# Altium PCB pag7936.PcbDoc
Units mil, origin at the board's own origin, x right, y up, seen from the top; angles counter-clockwise.
Board outline 1400 x 650 mil, 6 copper layers (Top, 2-GND, 3-SIG, 4-SIG, 5-GND, Bottom), stack 46.142 mil thick; 67 components, 48 nets, 242 pads, 88 vias.
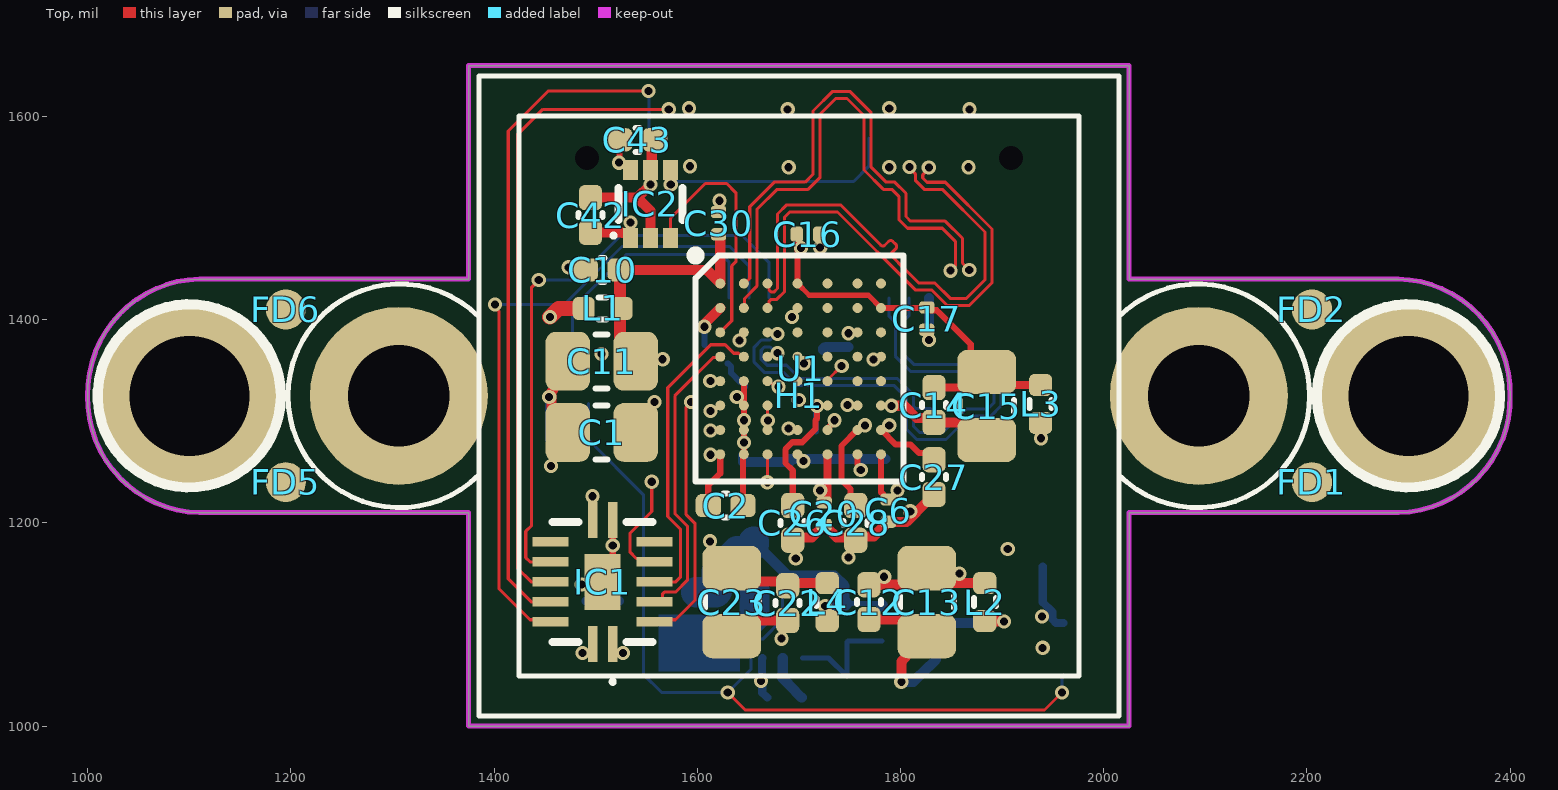
[diagram p0: Top view]
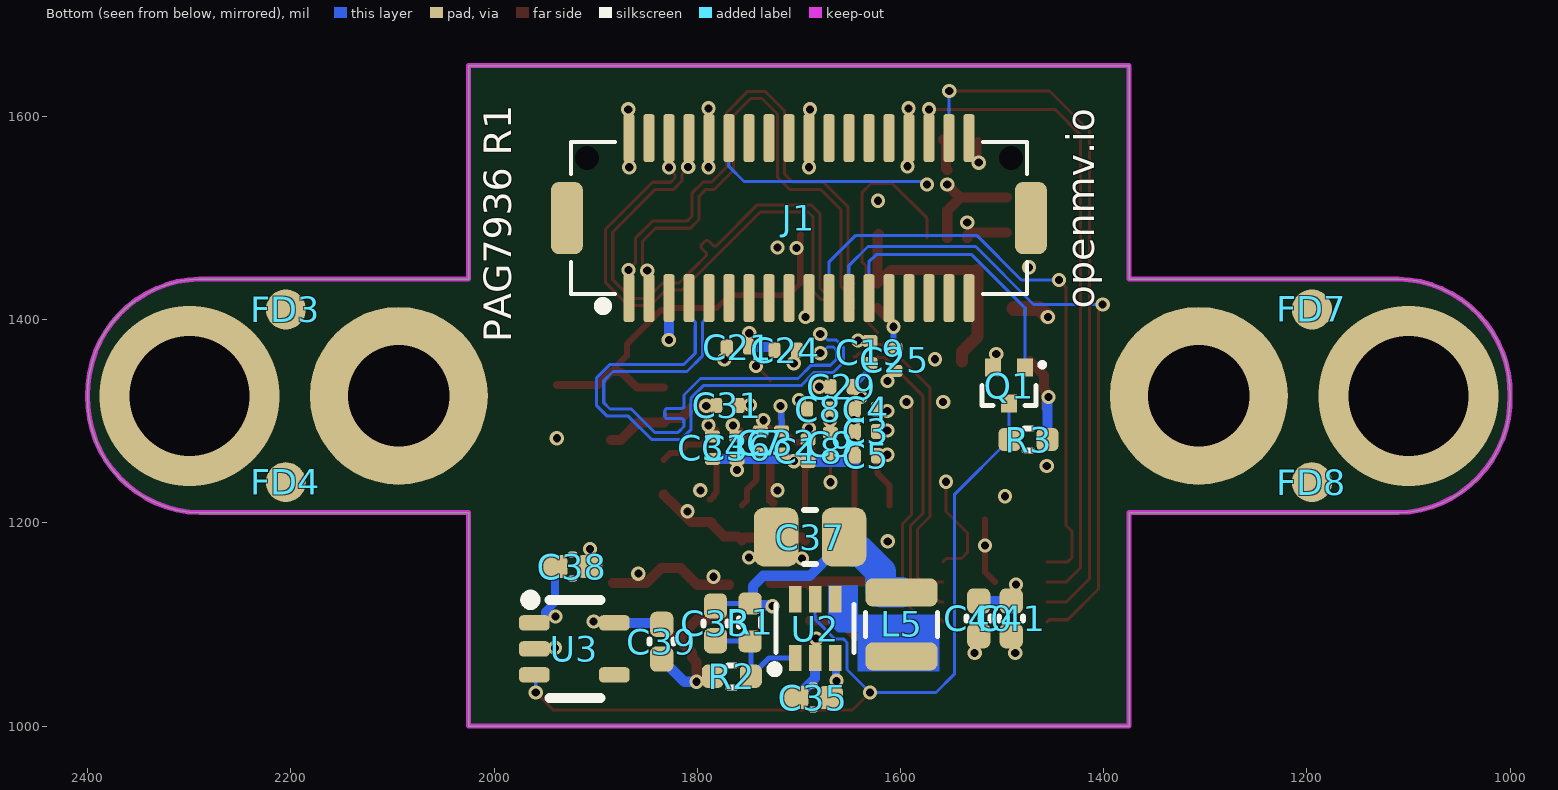
[diagram p1: Bottom view, seen from below]
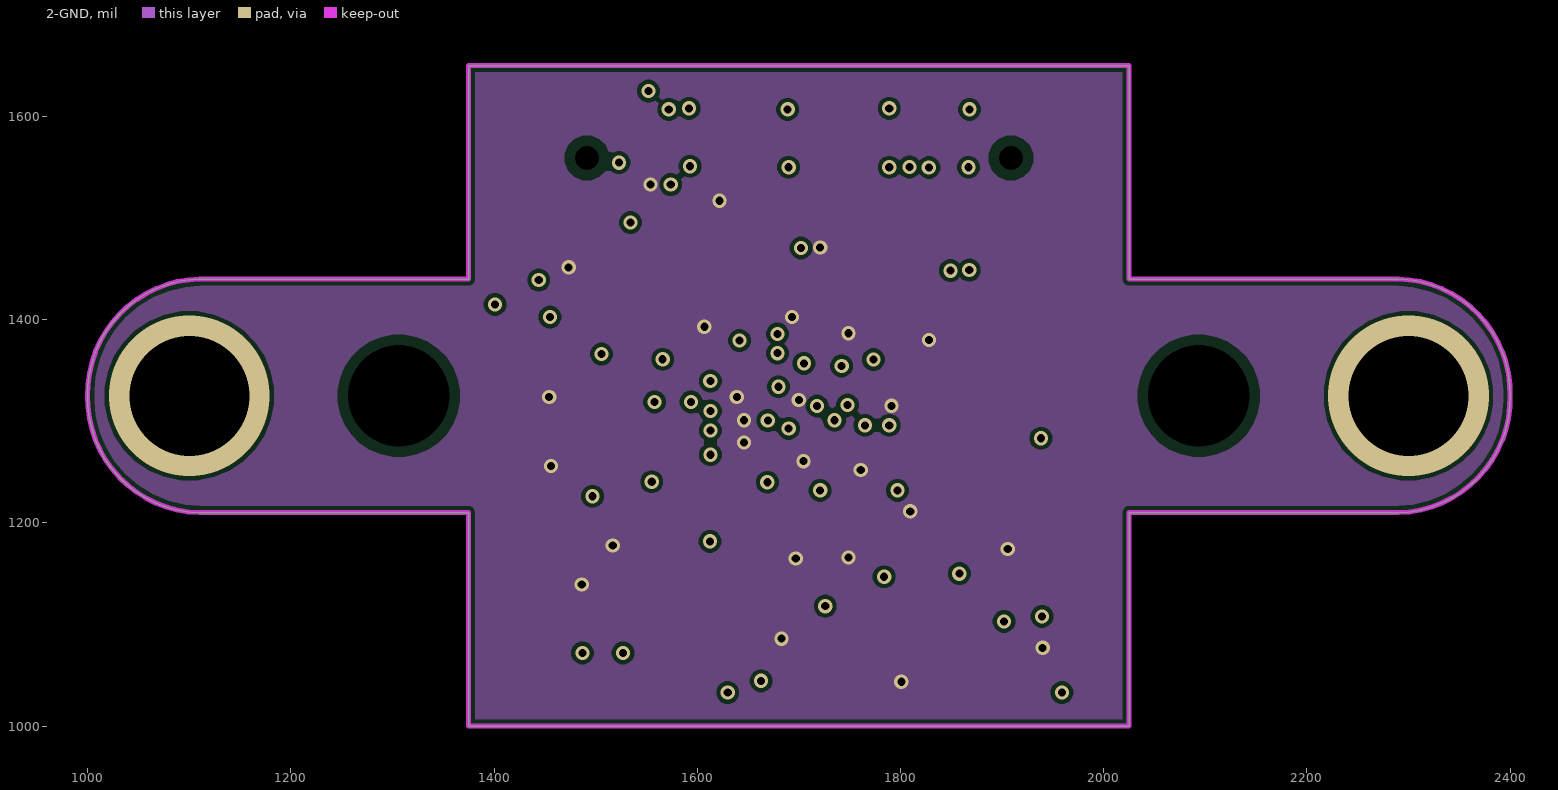
[diagram p2: 2-GND]
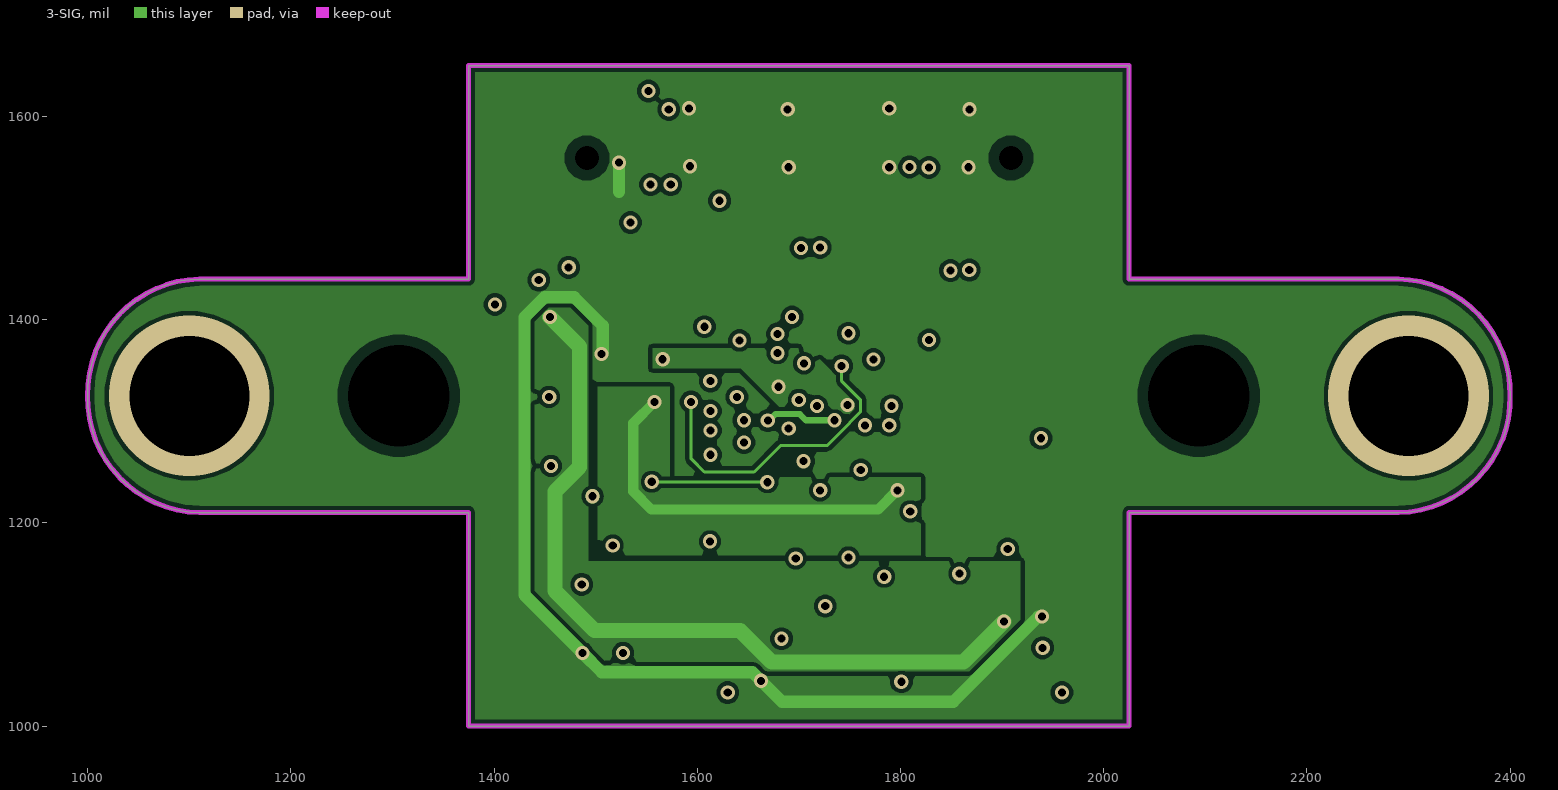
[diagram p3: 3-SIG]
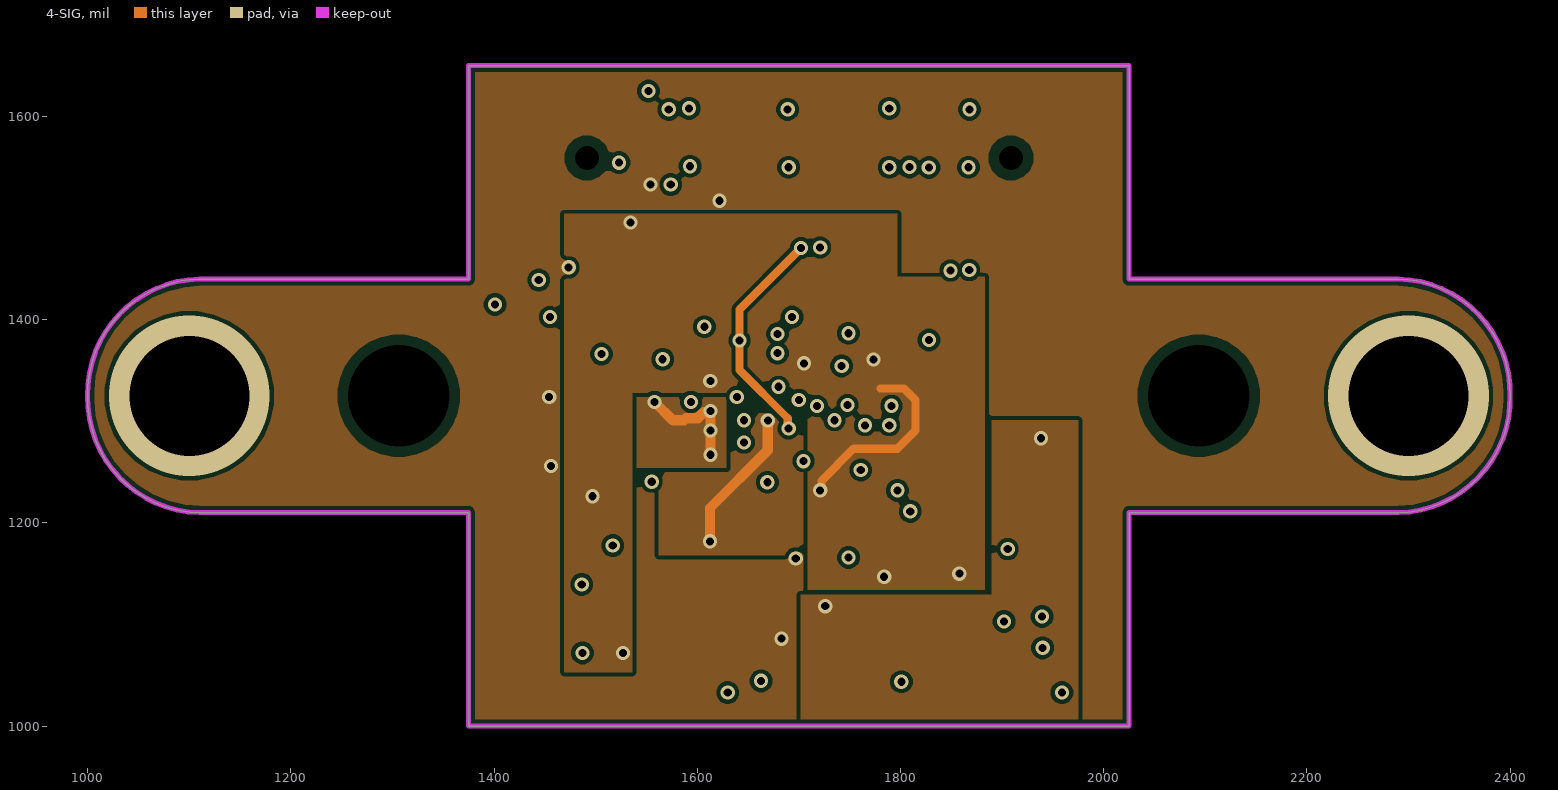
[diagram p4: 4-SIG]
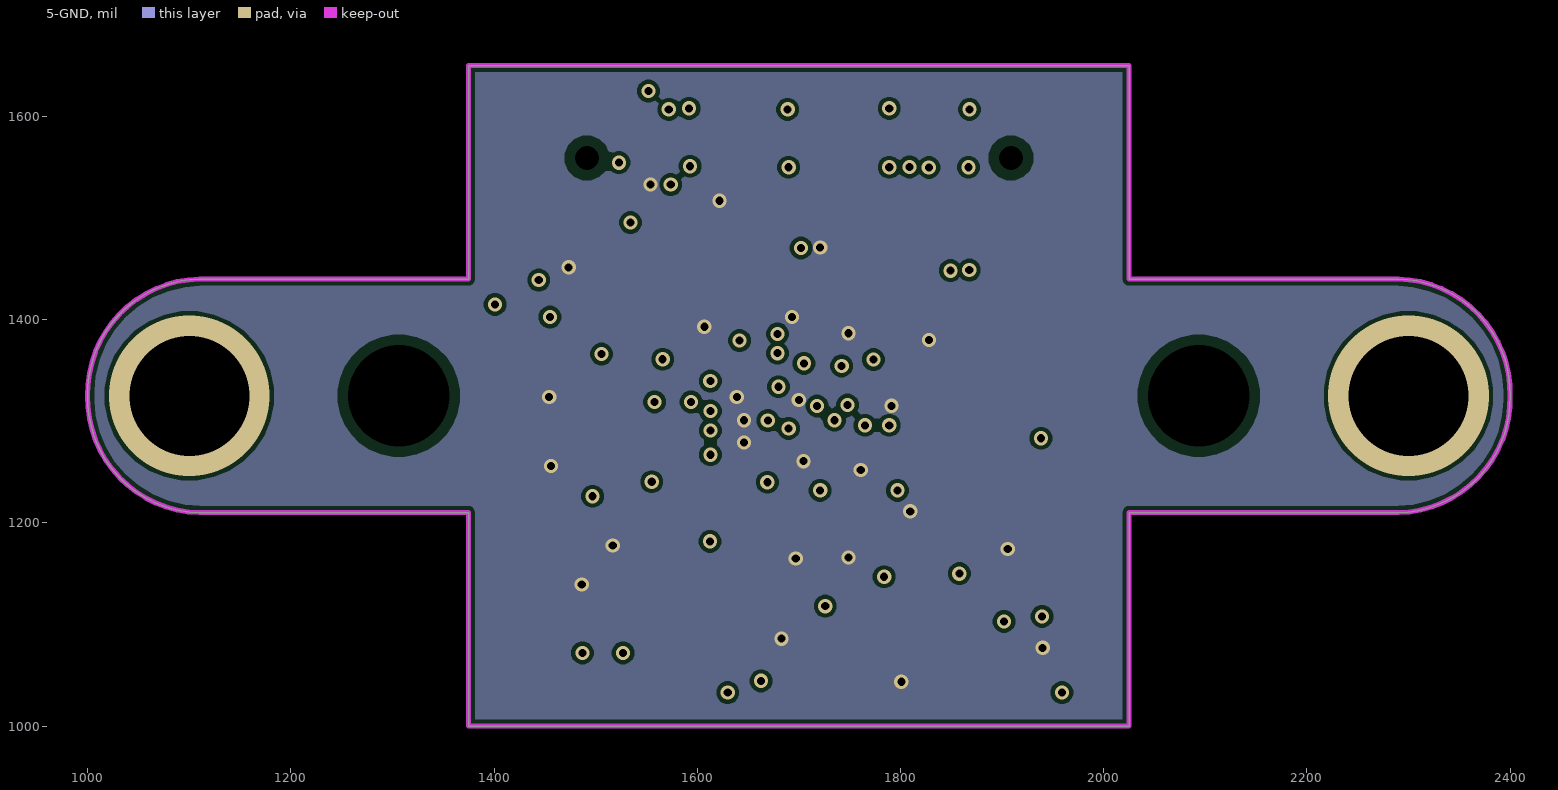
[diagram p5: 5-GND]
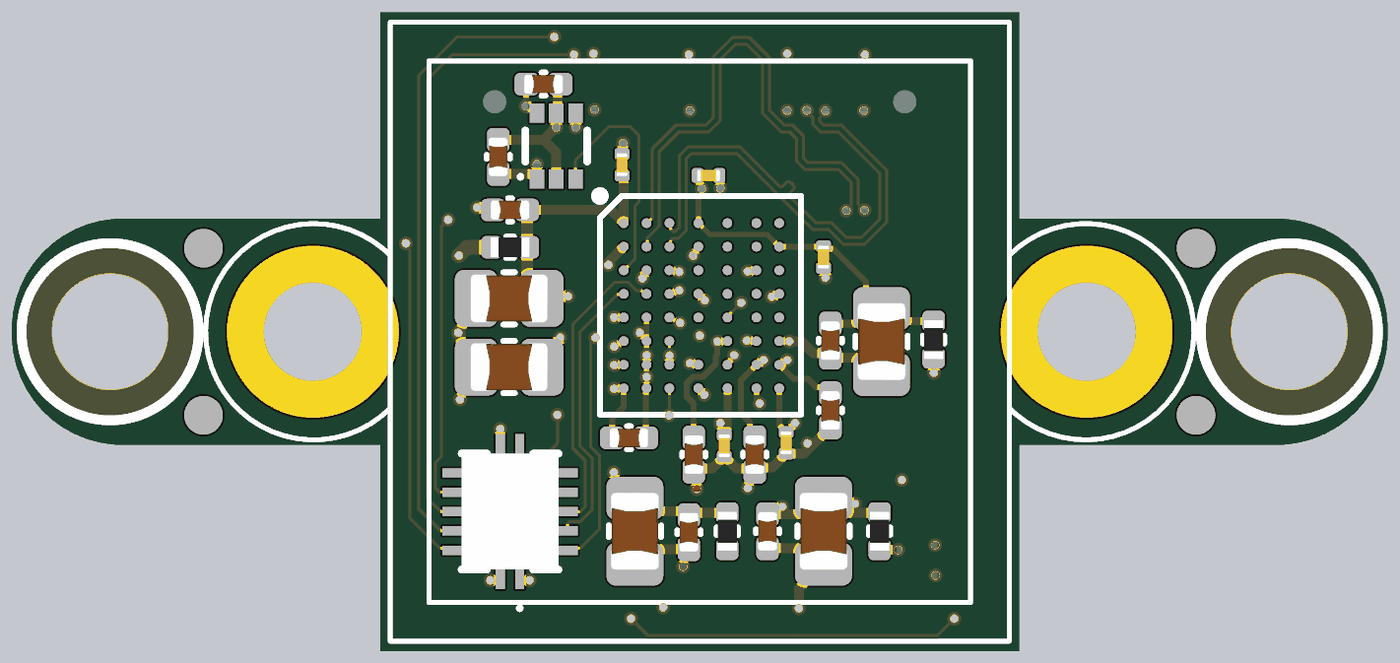
[diagram p6: 3D render of the assembled board from above, using the file's embedded part models]
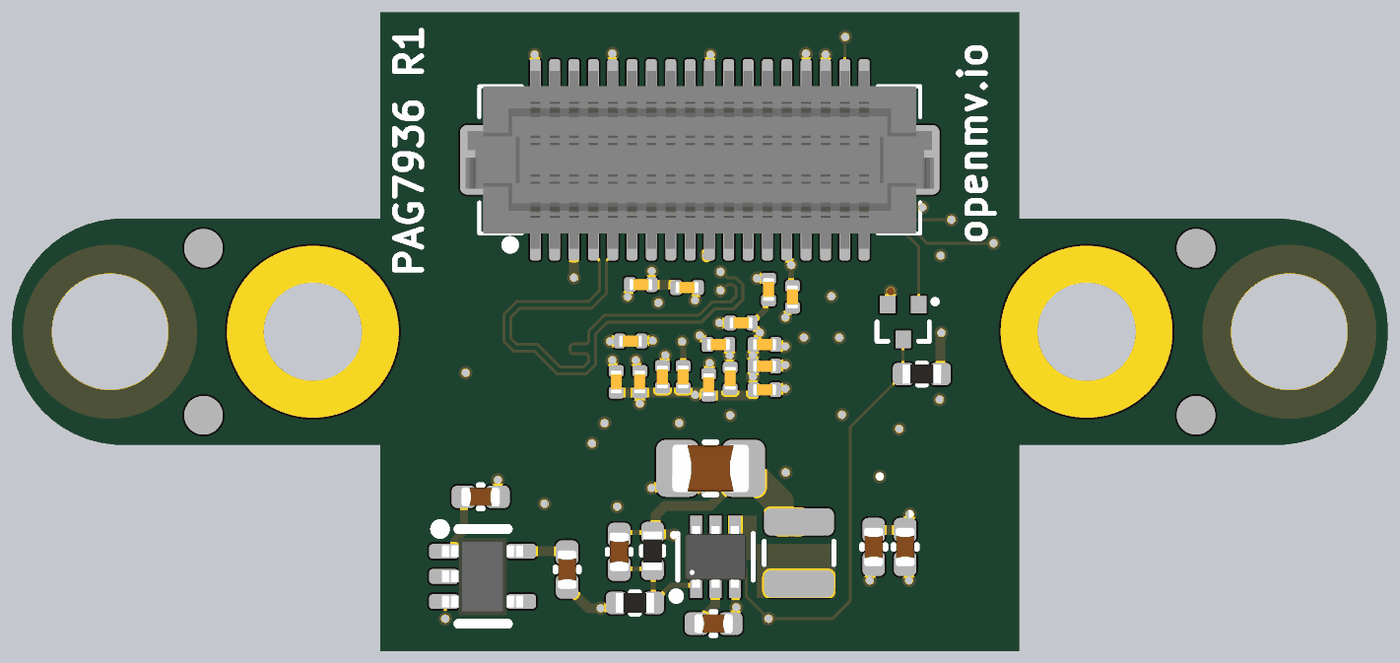
[diagram p7: 3D render of the assembled board from below, using the file's embedded part models]

## Layer stack, top to bottom
Top Solder: solder mask 0.4, Solder Resist, Dk 3.5
Top: signal copper 1.378
Dielectric 2: prepreg 5, PP-006, Dk 4.1
2-GND: signal copper 1.378
Dielectric 3: prepreg 10, PP-006, Dk 4.1
3-SIG: signal copper 1.378
Dielectric 1: dielectric 7.874, FR-4, Dk 4.8
4-SIG: signal copper 1.378
Dielectric 4: prepreg 10, PP-006, Dk 4.1
5-GND: signal copper 1.378
Dielectric 5: prepreg 5, PP-006, Dk 4.1
Bottom: signal copper 1.378
Bottom Solder: solder mask 0.4, Solder Resist, Dk 3.5

## Board outline
2290.03,1210 2025.03,1210 2025.03,1000 1375.03,1000 1375.03,1210 1110.03,1210 cw(c1112.53,1322.5) 1000.03,1325 cw(c1112.53,1327.5) 1110.03,1440 1375.03,1440 1375.03,1650 2025.03,1650 2025.03,1440 2290.03,1440 cw(c2287.53,1327.5) 2400.03,1325 cw(c2287.53,1322.5)

## Design rules (kind name [scope] priority, off if disabled: settings)
BoardOutlineClearance mdCopperDimension [All] p1: gap=4 ignorepadtopadclearanceinfootprint=FALSE
Clearance [All] p1: gap=4 ignorepadtopadclearanceinfootprint=FALSE except(5: SMDPad-Fill SMDPad-Poly SMDPad-Region; 10: THPad-Fill THPad-Poly THPad-Region)
ComponentClearance ComponentClearance_1 [InComponent('H1')] p1: gap=0 collisioncheckmode=3 verticalgap=0 showdistances=FALSE
ComponentClearance [All] p2: gap=5 collisioncheckmode=3 verticalgap=5 showdistances=FALSE
DiffPairsRouting [All] p1: maxlimit=4 minlimit=4 mostfreqgap=4 toplayer_minwidth=3 toplayer_maxwidth=3 toplayer_prefwidth=3 midlayer1_minwidth=3 midlayer1_maxwidth=3 midlayer1_prefwidth=3 midlayer2_minwidth=3 midlayer2_maxwidth=3 midlayer2_prefwidth=3 midlayer3_minwidth=3 midlayer3_maxwidth=3 midlayer3_prefwidth=3 midlayer4_minwidth=3 midlayer4_maxwidth=3 midlayer4_prefwidth=3 bottomlayer_minwidth=3 bottomlayer_maxwidth=3 bottomlayer_prefwidth=3 maxuncoupledlength=500
HoleSize HoleSize_For_NetClass_signal [InNetClass('signal')] p1: absolutevalues=TRUE maxlimit=4 minlimit=4 maxpercent=80.000 minpercent=20.000
HoleSize HoleSize_For_NetClass_pwr [InNetClass('pwr')] p2: absolutevalues=TRUE maxlimit=4 minlimit=4 maxpercent=80.000 minpercent=20.000
HoleSize HoleSize_For_NetClass_gnd [InNetClass('gnd')] p3: absolutevalues=TRUE maxlimit=4 minlimit=4 maxpercent=80.000 minpercent=20.000
HoleSize [All] p4: absolutevalues=TRUE maxlimit=100000 minlimit=4 maxpercent=80.000 minpercent=20.000
HoleToHoleClearance mdDrill [All] p1: gap=3 allowstackedmicrovias=TRUE
MinimumSolderMaskSliver [All] p1 off: minsoldermaskwidth=10
PasteMaskExpansion Expansion_SMDPaste_OFF [InPadClass('SMDPaste_OFF')] p1: expansion=0
PasteMaskExpansion mlMinCreamFrame [All] p2: expansion=0
PolygonConnect [All] p1: thpad.connectstyle=Relief thpad.reliefconductorwidth=10 thpad.reliefentries=4 thpad.polygonreliefangle="90 Angle" thpad.airgapwidth=10 smdpad.connectstyle=Relief smdpad.reliefconductorwidth=10 smdpad.reliefentries=4 smdpad.polygonreliefangle="90 Angle" smdpad.airgapwidth=10 via.connectstyle=Direct via.reliefconductorwidth=10 via.reliefentries=4 via.polygonreliefangle="90 Angle" via.airgapwidth=10
RoutingVias [All] p1: holewidth=8 width=14 viastyle="Through Hole" minholewidth=8 minwidth=14 maxholewidth=100 maxwidth=100
SolderMaskExpansion mlMinStopFrame [All] p1: expansion=2 istentingtop=FALSE
Width [All] p1: maxlimit=196.85 minlimit=3 preferedwidth=3
24 further rules are at their usual default settings.

## Classes and differential pairs
differential pair class MIPI: MIPI_CSI_CLK MIPI_CSI_D0 MIPI_CSI_D1
pad class SMDPaste_OFF: FD1-1 FD2-1 FD3-1 FD4-1 FD5-1 FD6-1 FD7-1 FD8-1 J1-1 J1-2 J1-3 J1-4 J1-5 J1-6 J1-7 J1-8 J1-9 J1-10 J1-11 J1-12 J1-13 J1-14 J1-15 J1-16 J1-17 J1-18 J1-19 J1-20 J1-21 J1-22 J1-23 J1-24 J1-25 J1-26 J1-27 J1-28 J1-29 J1-30 J1-31 J1-32 J1-33 J1-34 J1-35 J1-36
differential pair MIPI_CSI_D1: +MIPI_CSI_D1_P -MIPI_CSI_D1_N
differential pair MIPI_CSI_D0: +MIPI_CSI_D0_P -MIPI_CSI_D0_N
differential pair MIPI_CSI_CLK: +MIPI_CSI_CLK_P -MIPI_CSI_CLK_N

## Components (designator, comment, footprint, x,y, rotation, side; value= is the part's Value field where it differs from the comment)
C1 "22uF" 0805#1 1506,1289 r180 top
C2 "4.7uF" 0402-CAP 1628,1217 r0 top
C3 "0.22uF" C0201 1634,1290 r180 bottom
C4 "0.22uF" C0201 1634,1312 r180 bottom
C5 "0.22uF" C0201 1634,1266 r180 bottom
C6 "0.22uF" C0201 1788,1212 r90 top
C7 "0.22uF" C0201 1738,1279 r90 bottom
C8 "0.22uF" C0201 1681,1312 r180 bottom
C9 "0.22uF" C0201 1669,1277.59 r90 bottom
C10 "4.7uF" 0402-CAP 1507,1449 r0 top
C11 "22uF" 0805#1 1506,1359 r0 top
C12 "4.7uF" 0402-CAP 1769,1122 r90 top
C13 "22uF" 0805#1 1826,1122 r90 top
C14 "4.7uF" 0402-CAP 1833,1316 r90 top
C15 "22uF" 0805#1 1885,1315 r90 top
C16 "0.22uF" C0201 1709,1484 r180 top
C17 "0.22uF" C0201 1826,1401 r90 top
C18 "0.22uF" C0201 1691,1271 r90 bottom
C19 "0.22uF" C0201 1630,1368 r90 bottom
C20 "0.22uF" C0201 1725,1209 r90 top
C21 "0.22uF" C0201 1760,1373 r0 bottom
C22 "4.7uF" 0402-CAP 1689,1121 r90 top
C23 "22uF" 0805#1 1634,1122 r90 top
C24 "0.22uF" C0201 1713,1370 r180 bottom
C25 "0.22uF" C0201 1605.62,1360.54 r270 bottom
C26 "2.2uF" 0402-CAP 1694,1200 r270 top
C27 "2.2uF" 0402-CAP 1833,1245 r270 top
C28 "2.2uF" 0402-CAP 1756,1200 r270 top
C29 "0.22uF" C0201 1658,1334 r0 bottom
C30 "0.22uF" C0201 1621,1495 r270 top
C31 "0.22uF" C0201 1770.41,1315.52 r180 bottom
C32 "0.22uF" C0201 1717,1279 r90 bottom
C33 "10pF" 0402-CAP 1782,1101 r270 bottom
C34 "0.22uF" C0201 1785,1274 r90 bottom
C35 "4.7uF" 0402-CAP 1686,1028 r180 bottom
C36 "0.22uF" C0201 1761,1274 r90 bottom
C37 "22uF" 0805#2 1689,1186 r180 bottom
C38 "4.7uF" 0402-CAP 1923,1157 r0 bottom
C39 "4.7uF" 0402-CAP 1835,1083 r90 bottom
C40 "0.1uF" 0402-CAP 1523,1106 r90 bottom
C41 "0.1uF" 0402-CAP 1491,1106 r270 bottom
C42 "0.1uF" 0402-CAP 1495,1503 r90 top
C43 "0.1uF" 0402-CAP 1541,1577 r180 top
FD1 "FIDUCIAL1X2" FIDUCIAL-1X2 2205.03,1240 r0 top
FD2 "FIDUCIAL1X2" FIDUCIAL-1X2 2205.03,1410 r0 top
FD3 "FIDUCIAL1X2" FIDUCIAL-1X2 2205.03,1410 r180 bottom
FD4 "FIDUCIAL1X2" FIDUCIAL-1X2 2205.03,1240 r180 bottom
FD5 "FIDUCIAL1X2" FIDUCIAL-1X2 1195.03,1240 r0 top
FD6 "FIDUCIAL1X2" FIDUCIAL-1X2 1195.03,1410 r0 top
FD7 "FIDUCIAL1X2" FIDUCIAL-1X2 1195.03,1410 r180 bottom
FD8 "FIDUCIAL1X2" FIDUCIAL-1X2 1195.03,1240 r180 bottom
H1 "LENSMOUNT20MM" LENSMOUNT-20MM 1700.03,1325 r0 top locked
IC1 "NXS0104BQX" NXS0104BQX 1507,1142 r90 top
IC2 "74LVC1T45Z6-7" 74LVC1T45Z67 1554,1514 r0 top
J1 "DF12-36-DP" DF12-36-DP 1700.03,1500 r0 bottom locked
L1 "100" 0402 1507,1411 r180 top
L2 "100" 0402 1883,1122 r270 top
L3 "100" 0402 1938,1317 r270 top
L4 "100" 0402 1728,1122 r270 top
L5 "MAKK2016T1R0M" INDC2016X100N 1599,1100 r90 bottom
Q1 "SSM3J15FV,L3F" SSM3J15FV 1493,1335 r0 bottom
R1 "100K" R0402 1748,1102 r90 bottom
R2 "100K" R0402 1766,1049 r0 bottom
R3 "100K" R0402 1474,1282 r180 bottom
U1 "PAG7936" PAG7936 1701.8,1351.5 r0 top locked
U2 "TLV62568ADRLR" SOT50P160X60-6N 1684,1095.94 r90 bottom
U3 "2.8V LDO" SC70-5 1921,1076 r270 bottom

## Footprints (in the part's own frame and the unit in brackets; to place one, negate y for a bottom-side part, rotate by r counter-clockwise, add the part's x,y. Pads: shape width x height; smd on the part's side, far side on the other; paste and mask are expansions set on the pad)
74LVC1T45Z67 [mm]
  rect 0.375x0.5 smd: 1(-0.5,-0.85) 2(0,-0.85) 3(0.5,-0.85) 4(0.5,0.85) 5(0,0.85) 6(-0.5,0.85)
  silkscreen extent -0.97,-0.84 0.8,0.4
0402 [mm] "Chip Resistor, 2-Leads, Body  0402 (in) 1005 (mm), IPC Medium Density"
  rrect51% 0.55x0.58 smd mask+0.05: 1(-0.475,0) 2(0.475,0)
  silkscreen extent -0.1,-0.28 0.1,0.28, body extent -0.5,-0.25 0.5,0.25, height 0.34
0402-CAP [mm] "Chip Capacitor, 2-Leads, Body  0402 (in) 1005 (mm), IPC Medium Density"
  rrect52% 0.63x0.58 smd mask+0.05: 1(-0.435,0) 2(0.435,0)
  silkscreen extent -0.05,-0.3 0.05,0.3, body extent -0.5,-0.25 0.5,0.25, height 0.5
0805#1 [mm] "Chip Capacitor, Body 0805 imperial, 2.0x1.2mm, IPC Medium Density"
  rrect45% 1.11x1.47 smd mask+0.05: 1(-0.85,0) 2(0.85,0)
  silkscreen extent -0.15,-0.67 0.15,0.67, body extent -1,-0.62 1,0.63, height 1.25
0805#2 [mm] "Chip Capacitor, Body 0805 imperial, 2.0x1.2mm, IPC Medium Density"
  rrect45% 1.11x1.47 smd: 1(-0.85,0) 2(0.85,0)
  silkscreen extent -0.15,-0.67 0.15,0.67, body extent -1,-0.62 1,0.63, height 1.25
C0201 [mil] "0201 IPC-7351"
  rrect50% 12x15 smd mask+1.97: 1(-11,0) 2(11,0)
  body extent -12,-6 12,6, height 14
DF12-36-DP [mm] "36 Position Connector Receptacle, Center Strip Contacts Surface Mount Gold"
  rrect50% 0.8x1.8 smd mask+0.05: 0(-5.8,0) 0(5.8,0)
  rrect50% 0.28x1.2 smd mask+0.05: 1(4.25,2) 2(4.25,-2) 3(3.75,2) 4(3.75,-2) 5(3.25,2) 6(3.25,-2) 7(2.75,2) 8(2.75,-2) 9(2.25,2) 10(2.25,-2) 11(1.75,2) 12(1.75,-2) 13(1.25,2) 14(1.25,-2) 15(0.75,2) 16(0.75,-2) 17(0.25,2) 18(0.25,-2) 19(-0.25,2) 20(-0.25,-2) 21(-0.75,2) 22(-0.75,-2) 23(-1.25,2) 24(-1.25,-2) 25(-1.75,2) 26(-1.75,-2) 27(-2.25,2) 28(-2.25,-2) 29(-2.75,2) 30(-2.75,-2) 31(-3.25,2) 32(-3.25,-2) 33(-3.75,2) 34(-3.75,-2) 35(-4.25,2) 36(-4.25,-2)
  round 0 hole 0.6 unplated: MH1(-5.3,-1.5) MH2(5.3,-1.5)
  silkscreen extent -5.7,-1.9 5.7,2.3, body extent -6.05,-2.3 6.05,2.3, height 2.3
FIDUCIAL-1X2 [mm] "FIDUCIAL-1X2"
  rrect100% 1x1 smd paste+0: 1(0,0)
INDC2016X100N [mm] "INDC2016X100N"
  rrect50% 0.7x1.8 smd: 1(-0.8,0) 2(0.8,0)
  silkscreen extent -0.3,-0.9 0.3,0.9, body extent -1,-0.8 1,0.8, height 1
LENSMOUNT-20MM [mm] "LENSMOUNT-20MM"
  round 4.445 / inner round 0 / far side round 4.445 hole 2.54: P$1(-10,0) P$2(10,0)
  silkscreen extent -12.77,-8 12.77,8
NXS0104BQX [mm]
  rect 0.9x0.24 smd: 1(-1.55,-0.25) 7(1.55,-0.25) 8(1.55,0.25) 14(-1.55,0.25)
  rect 0.24x0.9 smd: 2(-1,-1.3) 3(-0.5,-1.3) 4(0,-1.3) 5(0.5,-1.3) 6(1,-1.3) 9(1,1.3) 10(0.5,1.3) 11(0,1.3) 12(-0.5,1.3) 13(-1,1.3)
  rect 1.4x0.9 smd: 15(0,0)
  silkscreen extent -2.55,-1.25 1.5,1.25, body extent -1.5,-1.25 1.5,1.25, height 0.85
PAG7936 [mm]
  round 0.25 smd mask+0.051: A1(-2.01,2.135) A2(-1.42,2.135) A3(-0.83,2.135) A4(-0.08,2.135) A5(0.67,2.135) A6(1.42,2.135) A7(2.01,2.135) B1(-2.01,1.525) B2(-1.42,1.525) B3(-0.83,1.525) B4(-0.08,1.525) B5(0.67,1.525) B6(1.42,1.525) B7(2.01,1.525) C1(-2.01,0.915) C2(-1.42,0.915) C3(-0.83,0.915) C4(-0.08,0.915) C5(0.67,0.915) C6(1.42,0.915) C7(2.01,0.915) D1(-2.01,0.305) D2(-1.42,0.305) D3(-0.83,0.305) D4(-0.08,0.305) D5(0.67,0.305) D6(1.42,0.305) D7(2.01,0.305) E1(-2.01,-0.305) E2(-1.42,-0.305) E3(-0.83,-0.305) E4(-0.08,-0.305) E5(0.67,-0.305) E6(1.42,-0.305) E7(2.01,-0.305) F1(-2.01,-0.915) F2(-1.42,-0.915) F3(-0.83,-0.915) F5(0.67,-0.915) F6(1.42,-0.915) F7(2.01,-0.915) G1(-2.01,-1.525) G2(-1.42,-1.525) G3(-0.83,-1.525) G4(-0.08,-1.525) G5(0.67,-1.525) G6(1.42,-1.525) G7(2.01,-1.525) H1(-2.01,-2.135) H2(-1.42,-2.135) H3(-0.83,-2.135) H4(-0.08,-2.135) H5(0.67,-2.135) H6(1.42,-2.135) H7(2.01,-2.135)
  silkscreen extent -2.72,-2.81 2.58,2.93, body extent -2.52,-2.74 2.48,2.74, height 0.8
R0402 [mm] "Chip Resistor, 2-Leads, Body  0402 (in) 1005 (mm), IPC Medium Density"
  rrect51% 0.55x0.58 smd mask+0.05: 1(-0.475,0) 2(0.475,0)
  silkscreen extent -0.1,-0.28 0.1,0.28, body extent -0.5,-0.25 0.5,0.25, height 0.34
SC70-5 [mil]
  rrect50% 15x30 smd: 1(-25.59,-39.37) 2(0,-39.37) 3(25.59,-39.37) 4(25.59,39.37) 5(-25.59,39.37)
  silkscreen extent -53,-48 48,26, body extent -39,-41 39,41, height 43
SOT50P160X60-6N [mm]
  rect 0.66x0.31 smd: 1(-0.735,0.5) 2(-0.735,0) 3(-0.735,-0.5) 4(0.735,-0.5) 5(0.735,0) 6(0.735,0.5)
  silkscreen extent -1.12,-0.97 0.6,1.12, body extent -0.8,-0.8 0.8,0.8, height 0.6
SSM3J15FV [mm]
  rect 0.4x0.45 smd: 1(-0.4,-0.45) 2(0.4,-0.45) 3(0,0.45)
  silkscreen extent -0.88,-0.58 0.67,0.5, body extent -0.6,-0.6 0.6,0.6, height 0.6

## Part data
C1 C11 C13 C15 C23 C37: library part 22UF-0805-6.3V-20%, "22ÂµF ceramic capacitors    A capacitor is a passive two-terminal electrical component used to store electrical energy temporarily in an electric field.", MPN=CL21A226MQQNNNE, DeviceName=-0805-6.3V-20%, DeviceSetName=22UF, GateName_1=G$1, LibraryName=SparkFun-Capacitors, PROD_ID=CAP-08402, SymbolName_1=CAP
C2: library part CAP0402-CAP, "CapacitorStandard 0603 ceramic capacitor, and 0.1\" leaded capacitor.", MPN=JMK105BBJ475MV-F, DeviceName=0402-CAP, DeviceSetName=CAP, GateName_1=G$1, LibraryName=sfe, Part Number=JMK105BBJ475MV-F, SymbolName_1=CAP
C3 C4 C5 C6 C7 C8 C9 C16 C17 C18 C19 C20 C21 C24 C25 C29 C30 C31 C32 C34 C36: library part C-EUC0201, "CAPACITOR, European symbol", MPN=GRM033R60J224ME15D, DeviceName=C0201, DeviceSetName=C-EU, GateName_1=G$1, LibraryName=rcl, Part Number=GRM033R60J224ME15D, POPULARITY=0, SPICEPREFIX=C, SymbolName_1=C-EU
C10 C12 C14 C22 C35 C38 C39: library part CAP_0402, "0402 (1005 Metric) Nick Garner - TeleSense", MPN=JMK105BBJ475MV-F, DeviceSetName=CAP_0402, GateName_1=G$1, LibraryName=0402, SymbolName_1=CAP
C26 C27 C28: library part CAP0402-CAP, "CapacitorStandard 0603 ceramic capacitor, and 0.1\" leaded capacitor.", MPN=CL05A225MQ5NNNC, DeviceName=0402-CAP, DeviceSetName=CAP, GateName_1=G$1, LibraryName=sfe, Part Number=CL05A225MQ5NNNC, SymbolName_1=CAP
C33: library part CAP_0402, "0402 (1005 Metric) Nick Garner - TeleSense", MPN=0402N100D500CT, DeviceSetName=CAP_0402, GateName_1=G$1, LibraryName=0402, SymbolName_1=CAP
C40 C41 C42 C43: library part C-EUC0201, "CAPACITOR, European symbol", MPN=C0402C104Z4VAC, DeviceSetName=C-EU, GateName_1=G$1, LibraryName=rcl, Part Number=C0402C104Z4VAC, POPULARITY=0, SPICEPREFIX=C, SymbolName_1=C-EU
FD1 FD2 FD3 FD4 FD5 FD6 FD7 FD8: "Fiducial Alignment Points    Point-of-reference for pick-and-place machines and other optical instruments.", DeviceName=1X2, DeviceSetName=FIDUCIAL, GateName_1=G$1, LibraryName=SparkFun-Aesthetics, SymbolName_1=FIDUCIAL
IC1: library part CMP-057-000000-1, "NXS0104 - Dual supply translating transceiver; open drain; autodirectionsensing@en-us", MANUFACTURER_NAME=Nexperia, Mouser Part Number=771-NXS0104BQX, <PN=NXS0104BQX, Datasheet Link=https://assets.nexperia.com/documents/data-sheet/NXS0104.pdf, Design Item ID=NXS0104BQX, Height=1mm, MANUFACTURER_PART_NUMBER=NXS0104BQX, Mouser Price/Stock=https://www.mouser.co.uk/ProductDetail/Nexperia/NXS0104BQX?qs=2WXlatMagcEya%2F7vq6wExg%3D%3D, MPN=NXS0104BQX, Part Number=NXS0104BQX, Source=SamacSys.SchLib
IC2: "Integrated Circuit", MANUFACTURER_NAME="Diodes Incorporated", Mouser Part Number=621-74LVC1T45Z6-7, Arrow Part Number=74LVC1T45Z6-7, Arrow Price/Stock=https://www.arrow.com/en/products/74lvc1t45z6-7/diodes-incorporated?region=nac, Datasheet Link=https://www.diodes.com//assets/Datasheets/74LVC1T45.pdf, Height=0.6mm, MANUFACTURER_PART_NUMBER=74LVC1T45Z6-7, Mouser Price/Stock=https://www.mouser.co.uk/ProductDetail/Diodes-Incorporated/74LVC1T45Z6-7?qs=Oxncjon6mbri043VV7aCkA%3D%3D
J1: MPN=DF12NB(3.0)-36DP-0.5V(51), DeviceSetName=DF12-36-DP, GateName_1=G$1, LibraryName=DF12NB(3.0)-36DP-0.5V(51), SymbolName_1=DF12-36
L1 L2 L3 L4: library part INDUCTOR_0402, MPN=MFBM1V1005-101-R, DeviceSetName=INDUCTOR_0402, GateName_1=G$1, LibraryName=0402, SymbolName_1=INDUCTOR
L5: "Ind Power Wirewound 1uH 20% 2MHz Metal 2200mA 0806 Check availability", PACKAGE="2016 Taiyo Yuden", AVAILABILITY="In Stock", DeviceSetName=MAKK2016T1R0M, GateName_1=G$1, LibraryName=MAKK2016T1R0M, MF="Taiyo Yuden", MP=MAKK2016T1R0M, MPN=MAKK2016T1R0M, Part Number=MAKK2016T1R0M, PRICE=None, PURCHASE-URL=https://pricing.snapeda.com/search/part/MAKK2016T1R0M/?ref=eda, SymbolName_1=MAKK2016T1R0M
Q1: library part PMXB120EPEZ, "MOSFET 30 V, P-channel Trench MOSFET   Source:  Datasheet", DeviceSetName=SSM3J15FV,L3F, GateName_1=G$1, Height=0.4mm, LibraryName=SSM3J15FV,L3F, MANUFACTURER_PART_NUMBER=SSM3J15FV,L3F, MOUSER_PART_NUMBER=SSM3J15FV,L3F, MPN=SSM3J15FV,L3F, SymbolName_1=SSM3J15FV,L3F
R1 R2 R3: library part R-US_R0402, "RESISTOR, American symbol", MPN=AC0402FR-07100KL, DeviceName=R0402, DeviceSetName=R-US_, GateName_1=G$1, LibraryName=rcl, POPULARITY=34, SPICEPREFIX=R, SymbolName_1=R-US
U2: library part CMP-052-000000-1, "2.5V-5.5V input, 1A high efficiency step-down buck converter with forced PWM in small SOT563 package 6-SOT-5X3 -40 to 125", PACKAGE="SOT-5X3-6 Texas Instruments", AVAILABILITY=Good, Check_prices=https://www.snapeda.com/parts/TLV62568ADRLR/Texas%20Instruments/view-part/2776350/?ref=eda, Component Type=Standard, Design Item ID=TLV62568ADRLR, MF="Texas Instruments", MP=TLV62568ADRLR, MPN=TLV62568ADRLR, Part Number=TLV62568ADRLR, Pin Count=5, PRICE=None, PURCHASE-URL=https://pricing.snapeda.com/search/part/TLV62568ADRLR/?ref=eda, SnapEDA_Link=https://www.snapeda.com/parts/TLV62568ADRLR/Texas%20Instruments/view-part/2776350/?ref=snap, Source=TLV62568ADRLR.SchLib
U3: library part MIC5365-3.3YC5-TR, MPN=MIC5365-2.8YC5-TR, MF=Microchip, Part Number=MIC5365-2.8YC5-TR
H1: DeviceName=20MM, DeviceSetName=LENSMOUNT, GateName_1=G$1, LibraryName=lensmount, SymbolName_1=LENS
U1: MF=PixArt, MPN=PAG7936

## Via types
v1: diameter 14, hole 8, Top to Bottom, tented both sides, 86 vias
v2: diameter 177.17/158.11/158.11/158.11/158.11/177.17 (per signal layer), hole 118.11, Top to Bottom, 2 vias

## Nets (pads, with @x,y where several pads share a name; then routed paths per layer and width w, separated by ;. In a path a pad name is that pad's centre, name@x,y a point inside that pad or via, vN(x,y) a via of type N, cw(c..) or ccw(c..) an arc to the next point about the centre after c; other vN are vias at no path point)
DCMI_CLK: IC2.4 J1.12 | length 230.3
  Bottom w3: v1(1573.9,1532.93) 1576.88,1532.93 1579.94,1535.99 1753.99,1535.99 1768.93,1550.93 J1.12
DCMI_CLK_INT: IC2.3 U1.C1 | length 245.2
  Top w3: IC2.3 1573.68,1499.68 1608,1534 1629,1534 1638,1525 1638,1457 1634,1453 1634,1398.86 U1.C1
DCMI_D0: J1.31
DCMI_D1: J1.29
DCMI_D2: J1.35
DCMI_D3: J1.28
DCMI_D4: J1.26
DCMI_D5: J1.33
DCMI_D6: J1.24
DCMI_D7: J1.22
DCMI_FSIN: IC1.13 J1.23 | length 659
  Top w3: v1(1401,1415) 1401,1412.02 1405.02,1408 1405.02,1134.98 1435.36,1104.64 1453.81,1104.64 IC1.13
  Bottom w3: v1(1401,1415) 1469,1415 1526,1472 1632,1472 1650.82,1453.18 J1.23
DCMI_FSIN_INT: IC1.2 U1.E5 | length 575.7
  Top w3: IC1.2 1560.19,1104.64 1578.64,1104.64 1598,1124 1598,1199.12 1589.11,1208.01 1589.11,1314.11 v1(1594,1319) ; U1.E5 1728.18,1340.51 v1(1742.17,1354.5)
  3-SIG w3: v1(1594,1319) 1594,1263 1607,1250 1656,1250 1682,1276 1727.68,1276 1750.34,1298.66 1750.34,1299.02 1760.5,1309.18 1760.5,1321.18 1742.17,1339.51 v1(1742.17,1354.5)
DCMI_HSYNC: J1.18
DCMI_PCLK: J1.14
DCMI_PWDN: J1.25 Q1.1 | length 272.8
  Bottom w3: Q1.1 1477.25,1411.25 1530,1464 1624,1464 1631.13,1456.87 J1.25
DCMI_PWDN_INT: Q1.3 R3.1 U2.5 U3.3 | length 859.8
  Top w3: v1(1630,1033) 1647.17,1015.83 1941.83,1015.83 v1(1959,1033)
  Bottom w3: Q1.3 1493,1282.3 R3.1 1547,1227.7 1547,1051 1565,1033 v1(1630,1033) 1652.71,1055.71 1652.71,1082.27 1655.93,1085.49 1664.49,1085.49 1684,1105 U2.5 ; v1(1959,1033) 1959,1049.04 U3.3
DCMI_RST: IC1.10 J1.21 | length 595.7
  Top w3: v1(1444,1439) 1437,1432 1437,1197.44 1431.24,1191.69 1431.24,1165.76 1435.32,1161.68 IC1.10
  Bottom w3: v1(1444,1439) 1481,1439 1525,1483 1644,1483 1670.5,1456.5 J1.21
DCMI_RST_INT: IC1.5 U1.H3 | length 247.7
  Top w3: v1(1555.23,1240.44) 1555.23,1211.23 1534,1190 1534,1171 1539.01,1165.99 1540.09,1164.91 1554.96,1164.91 IC1.5 ; v1(1669,1240) 1669,1267.32 U1.H3
  3-SIG w3: v1(1555.23,1240.44) 1555.66,1240 v1(1669,1240)
DCMI_SCL: IC1.11 J1.32 | length 624.2
  Top w3: IC1.11 1436.6,1142 1423,1155.6 1423,1582 1448,1607 v1(1572,1607)
DCMI_SCL_INT: IC1.4 U1.D2 | length 316
  Top w3: IC1.4 1579,1142 1583.32,1146.32 1583.32,1194 1571,1206.32 1571,1333 1613.28,1375.28 1627.46,1375.28 1635.81,1366.93 1640.72,1366.93 1644.14,1363.51 U1.D2
DCMI_SDA: IC1.12 J1.34 | length 692.7
  Top w3: IC1.12 1436.6,1122.32 1414,1144.92 1414,1585.73 1453.27,1625 v1(1552,1625)
  Bottom w3: v1(1552,1625) 1552.39,1624.61 J1.34
DCMI_SDA_INT: IC1.3 U1.D1 | length 290.7
  Top w3: IC1.3 1562.42,1122.32 1565.65,1125.54 1565.65,1129.78 1567.64,1131.78 1578.67,1131.78 1590.32,1143.43 1590.32,1196.9 1578,1209.22 1578,1325 1615.93,1362.93 1622.08,1362.93 U1.D1
DCMI_VSYNC: J1.16
GND: C1.2 C2.2 C3.1 C4.1 C5.1 C6.1 C7.1 C8.1 C9.1 C10.1 C11.1 C12.1 C13.1 C14.1 C15.1 C16.1 C17.1 C18.1 C19.1 C20.1 C21.1 C22.1 C23.1 C24.1 C25.1 C26.2 C27.2 C28.2 C29.1 C30.1 C31.1 C32.1 C34.1 C35.1 C36.1 C37.1 C38.1 C39.1 C40.2 C41.1 C42.2 C43.1 IC1.7 IC1.15 IC2.2 IC2.5 J1.5 J1.19 J1.27 R2.2 R3.2 U1.B1 U1.B4 U1.C6 U1.E2 U1.F2 U1.F7 U1.G2 U1.H2 U1.H4 U1.H6 U2.2 U3.2 | length 1313.5
  Top w6: IC1.15 1516.84,1151.84 IC1.7 ; C2.2 1645.13,1265.64 1645.89,1266.41 U1.H2 v1@1645.89,1279.11 ; U1.E2 U1.F2 U1.G2 v1@1645.89,1279.11 ; v1(1646,1279) v1@1645.89,1279.11 ; U1.H6 1757.71,1257.46 1761,1254.16 v1(1761,1252)
  Top w10: C1.2@1456.66,1313.52 1456.66,1329.21 1458.67,1331.21 1458.67,1345.13 C11.1 ; C42.2 1541.13,1520.13 ; IC2.2 1554,1507.25 1541.13,1520.13 ; v1(1554,1533) 1541.13,1520.13 ; IC2.5 1555.18,1548.64 1555.18,1574.05 C43.1 ; v1(1607,1393) 1607.77,1393.77 1607.77,1396.64 U1.B1 ; C23.1 1643.7,1088.54 1659.04,1103.87 C22.1 ; C26.2 1696.84,1185.71 1712.71,1185.71 1722.5,1195.5 1722.5,1197 1723.5,1198 C20.1 1726.5,1198 1727.5,1197 1727.5,1195.5 1737.29,1185.71 1753.16,1185.71 C28.2 1759.84,1186.71 1773.71,1186.71 1785.5,1198.5 1785.5,1200 1786.5,1201 C6.1 1806.13,1201 1826.18,1221.05 1826.65,1221.05 1833,1227.4 C27.2 ; C12.1 1799.96,1104.87 1816.3,1088.54 C13.1@1821.53,1088.54 ; v1(1791.18,1315.2) 1803.8,1315.2 1815.79,1303.21 1828.66,1303.21 C14.1 1857.96,1298.87 1875.3,1281.54 C15.1 ; v1(1800.9,1043.6) 1800.9,1063.44 1805.05,1067.58 1805.05,1072.05 C13.1@1821.53,1088.54 ; C13.1 C13.1@1821.53,1088.54
  Bottom w6: C25.1@1607,1375 v1(1607,1393) ; C19.1 1630.24,1357 1633.24,1354 1633.24,1347.76 1642.5,1338.5 1644,1338.5 1647,1335.5 C29.1
  Bottom w10: v1(1454.24,1323.92) 1454.24,1322.84 1455.3,1321.79 R3.2 ; C41.1 C40.2 ; C5.1 1645,1260 C18.1 1691,1263 C36.1 C34.1 ; U2.2 1684.22,1066.78 1684.22,1046.91 1696.3,1034.82 1696.3,1034.35 1702.65,1028 C35.1 ; C24.1 1724,1371.5 1725,1372.5 1726.5,1372.5 1727,1373 C21.1 ; v1(1800.9,1043.6) 1812.72,1043.6 1827.6,1058.47 1828.08,1058.47 1835,1065.4 C39.1 ; v1(1828,1380) J1.5
  other v1: 1940,1077 1683,1086 1486.31,1139.35 1697,1165 1749,1166 1905.58,1174.24 1516.91,1177.68 1809.72,1211.35 1456,1256 1704.7,1260.73 1646,1301 1700,1321 1639,1324 1748.83,1386.64 1693.36,1402.54 1473.48,1451.5 1721,1471 1622,1517
MIPI_CSI_CLK_N: J1.9 U1.D3 | length 540.6
  Bottom w3: v1@1680.26,1367 v1(1679,1367) 1677.74,1367 1671.74,1373 1666,1373 1663,1370 1663,1361 1668.87,1355.13 1687.77,1355.13 1700.9,1342 1796.9,1342 1813,1325.9 1813,1315.61 ccw(c1816,1315.61) 1816,1312.61 1829,1312.61 cw(c1829,1309.61) 1832,1309.61 1832,1305.61 cw(c1829,1305.61) 1829,1302.61 1816,1302.61 ccw(c1816,1299.61) 1813,1299.61 1813,1294.9 1818.29,1289.61 1818.95,1288.95 1841.95,1288.95 1865,1312 1885.86,1312 1892.06,1318.2 1892.06,1339.85 1882.91,1349 1810.1,1349 1795,1364.1 1795,1390.48 1794.95,1390.52 1794.95,1397.38 1788.61,1403.72 J1.9
MIPI_CSI_CLK_P: J1.7 U1.C3 | length 542.5
  Bottom w3: v1@1680.26,1386 v1(1679,1386) 1677.74,1386 1671.74,1380 1663.1,1380 1656,1372.9 1656,1358.1 1665.97,1348.13 1684.87,1348.13 1698,1335 1794,1335 1806,1323 1806,1292 1813.34,1284.66 1816.05,1281.95 1844.85,1281.95 1867.9,1305 1888.76,1305 1899.06,1315.3 1899.06,1342.75 1885.81,1356 1813,1356 1802,1367 1802,1393.95 1801.95,1394 1801.95,1397.38 1808.3,1403.72 J1.7
MIPI_CSI_D0_N: J1.8 U1.A3 | length 513.7
  Top w3: U1.A3 1670.43,1434.25 1670.43,1429.48 1672.87,1427.05 1675.35,1427.05 1679,1430.69 1679,1503.9 1688.1,1513 1741,1513 1779.5,1474.5 1780.56,1473.44 ccw(c1782.68,1475.56) 1784.8,1473.44 1788.34,1476.97 cw(c1790.46,1474.85) 1792.58,1476.97 1795.41,1474.15 cw(c1793.29,1472.02) 1795.41,1469.9 1791.87,1466.37 ccw(c1794,1464.25) 1791.87,1462.13 1803.36,1450.64 1804.42,1449.58 1818,1436 1833.9,1436 1848.95,1420.95 1864.95,1420.95 1883.18,1439.18 1883.18,1486.31 1841.24,1528.24 1823.31,1528.24 1814.97,1536.59 1814.97,1543.04 1808.97,1549.04 v1(1808.97,1550.29)
MIPI_CSI_D0_P: J1.6 U1.B3 | length 508
  Top w3: U1.B3 1670.43,1412.85 1670.43,1417.61 1672.87,1420.05 1678.25,1420.05 1686,1427.79 1686,1501 1691,1506 1738.1,1506 1815.1,1429 1831,1429 1846.05,1413.95 1867.85,1413.95 1890.18,1436.28 1890.18,1489.21 1844.14,1535.24 1826.21,1535.24 1821.97,1539.49 1821.97,1542.49 1827.97,1548.49 v1(1827.97,1549.75)
MIPI_CSI_D1_N: J1.3 U1.B2 | length 513.1
  Top w3: U1.B2 1646.47,1412.11 1646.47,1420.7 1658.7,1432.93 1658.7,1508.33 1678.65,1528.28 1709.18,1528.28 1721,1540.1 1721,1602.48 1736.22,1617.7 1747.36,1617.7 1764.18,1600.88 1764.18,1547.24 1783.14,1528.28 1791.52,1528.28 1798.4,1521.4 1798.4,1498.6 1807.05,1489.95 1841.15,1489.95 1854,1477.1 1854,1453.04 v1(1849.2,1448.24)
MIPI_CSI_D1_P: J1.1 U1.A2 | length 510.1
  Top w3: U1.A2 1646.67,1435.56 1651.7,1440.59 1651.7,1511.23 1675.76,1535.28 1706.28,1535.28 1714,1543 1714,1605.38 1733.32,1624.7 1750.26,1624.7 1771.18,1603.78 1771.18,1550.14 1786.04,1535.28 1794.42,1535.28 1805.4,1524.3 1805.4,1501.5 1809.95,1496.95 1844.05,1496.95 1861,1480 1861,1455.59 v1(1867.79,1448.81)
SPI_MISO: J1.15
SPI_MOSI: J1.17
SPI_SCLK: J1.13
SPI_SSEL: J1.11
VCC_2.8V: C39.2 L1.2 L2.2 U3.5 | length 882.3
  Top w10: L2.2 1883.15,1103.15 1901.85,1103.15 v1(1902,1103)
  Top w15: v1(1454.96,1402.5) 1463.46,1411 L1.2
  3-SIG w15: v1(1454.96,1402.5) 1484,1373.46 1484,1255 1459.92,1230.92 1459.92,1133.08 1499,1094 1642.23,1094 1673.23,1063 1862,1063 v1(1902,1103)
  Bottom w10: C39.2 1836.46,1101.59 U3.5
VCC_3.3V: C35.2 C38.2 C41.2 C43.2 IC1.14 IC2.6 J1.2 J1.10 J1.20 J1.30 J1.36 Q1.2 U2.3 U3.1 | length 1148.8
  Top w6: v1(1522.98,1554.54) 1523.43,1554.99 1523.43,1576.56 C43.2
  3-SIG w12: v1(1505.76,1366.16) 1505.76,1366.7 1507,1367.94 1507,1394 1479,1422 1449.71,1422 1430,1402.29 1430,1129 v1(1487,1072) 1506,1053 1654.4,1053 v1(1662.9,1044.5) 1683.4,1024 1852,1024 1935.57,1107.57 1939.09,1107.57 v1(1939.47,1107.96) ; 1522.98,1525.98 v1(1522.98,1554.54)
  Bottom w8: v1(1662.9,1044.5) v1@1663.52,1045.12 ; v1@1662.9,1045.74 v1@1663.52,1045.12 ; U2.3 1663.61,1066.29 1663.61,1045.21 v1@1663.52,1045.12 ; C35.2 1664.05,1032.83 1664.05,1044.59 v1@1663.52,1045.12 ; C38.2 1940.13,1121.83 1949.73,1112.23 1949.73,1105.09 1953.23,1101.59 U3.1
  other v1: 1690,1550 1789,1550 1867,1550 1593,1551 1689,1607 1868,1607 1592,1608 1789,1608
VDD_1.2V: C14.2 C15.2 C16.2 C17.2 C18.2 C19.2 L3.1 U1.A4 U1.B7 U1.C2 U1.G4 | length 617.5
  Top w5: U1.A4 1710.21,1424 1768.47,1424 U1.B7
  Top w6: C16.2 1698.65,1483.35 U1.A4 ; U1.B7 1825.54,1411.54 C17.2 1828.74,1409.26 1835.74,1409.26 1869.2,1375.8 1869.2,1364.26 C15.2
  Top w8: C14.2 1859.42,1333.13 1874.76,1348.46 C15.2 1897.76,1335.7 L3.1
  4-SIG w8: v1(1690,1293) 1689.07,1293.93 1689.07,1302.93 1641.71,1350.29 v1(1641.71,1379.43) 1641.71,1409.98 v1(1702.23,1470.51)
VDD_1.2V_REG: C33.1 C37.2 L3.2 L4.2 L5.2 R1.2 | length 279.2
  Bottom w5: R1.2 1779.43,1120.7 C33.1
  Bottom w10: C37.2 1655.54,1181.53 1689.06,1148 1735,1148 1745.04,1137.96 1745.04,1123.66 R1.2 1746.12,1118.82 1727.91,1118.82 1727.08,1118 v1(1726,1118)
  Bottom w12: C33.1 C33.1@1782,1118.54
  Bottom w30: L5.2 1618.21,1131.5 1619.43,1132.72 1619.43,1151.93 1639.57,1172.06 1648.68,1172.06 1655.54,1178.91 C37.2@1655.54,1181.53
  other v1: 1938.22,1283.27
VDD_2.8V: C10.2 C11.2 C29.2 C30.2 C31.2 L1.1 U1.A1 U1.E3 U1.F6 | length 263.1
  Top w3: U1.E3 1670.97,1339.49 1674.36,1336.1 1677.9,1336.1 v1(1680,1334)
  Top w10: C10.2 1609.22,1449 U1.A1 1622.67,1483 1621.67,1484 C30.2
  Top w12: C10.2 1524.13,1383.5 1539.46,1368.16 C11.2
  other v1: 1748,1316 1566,1361
VDD_REG_FB: C33.2 R1.1 R2.1 U2.1 | length 119.9
  Bottom w5: U2.1 1729.3,1067 R2.1 1747.3,1082.6 R1.1 1748.57,1083.87 C33.2
VDD_REG_SW: L5.1 U2.4
VDDA: J1.4
VDDA_1.2V: C7.2 C8.2 C9.2 C22.2 C23.2 L4.1 U1.F3 U1.G3 U1.G5 | length 339.9
  Top w3: U1.F3 1669.06,1315.41 1669.06,1301.1 v1(1669.48,1300.68)
  Top w6: U1.G5 1728.18,1292.5 1735,1299.32 v1(1735,1301)
  Top w10: C23.2@1631.37,1142.32 1684.81,1142.32 C22.2 1691.57,1140.7 L4.1
  3-SIG w6: v1(1669.48,1300.68) 1670.67,1300.68 1677,1307 1701,1307 1707,1301 v1(1735,1301)
  4-SIG w10: v1(1612.55,1181.82) 1612.55,1214.55 1669.48,1271.48 v1(1669.48,1300.68)
VDDAY: C1.1 C2.1 C3.2 C4.2 C5.2 C6.2 U1.F1 U1.G1 U1.H1 U1.H7 | length 578.3
  Top w6: C2.1 1610.87,1236.87 1622.67,1248.67 U1.H1 ; U1.H7 1780.93,1230.07 1783.5,1227.5 1783.5,1226 1786.5,1223 C6.2
  3-SIG w10: v1(1558,1319) 1537,1298 1537,1231 1555,1213 1778,1213 v1(1797,1232)
  4-SIG w10: v1(1558,1319) 1576,1301 1587,1301 1589,1303 1600.63,1303 v1@1606.86,1309.23 ; v1(1613,1267) v1(1613,1291) v1(1613,1310)
VDDIO_2.8V: C12.2 C13.2 C20.2 C21.2 C24.2 C25.2 C40.1 C42.1 IC1.1 IC1.8 IC2.1 L2.1 U1.D4 U1.D7 U1.E1 U1.H5 | length 411.9
  Top w8: C20.2 1726.18,1220 1728.18,1222 U1.H5
  Top w10: C42.1 1526.08,1485.87 1526.57,1485.38 1531.93,1485.38 1534.32,1483 IC2.1 ; C12.2 1799.96,1139.13 1816.3,1155.46 C13.2 1835.7,1155.46 1850.47,1140.7 L2.1
  3-SIG w14: v1(1497.04,1226.13) v1(1497.04,1226.13) v1@1497,1226.17
  4-SIG w8: v1(1721,1232) 1722.15,1233.15 1722.15,1241.15 1754,1273 1797,1273 1815,1291 1815,1321 1803.65,1332.35 1780.32,1332.35
  other v1: 1527,1072 1784,1147 1858,1150 1612.92,1339.58 1705,1357 1773.37,1360.65 1534.33,1495.5
VNEG: C28.1 C36.2 U1.G6 | length 86.6
  Top w6: C28.1 1750.9,1222.22 1750.9,1233.1 1742,1242 1742,1275.76 U1.G6
  other v1: 1765,1296
VPOS: C27.1 C34.2 U1.G7 | length 64.2
  Top w6: U1.G7 1795.39,1277 1810,1277 1818.4,1268.6 1826.53,1268.6 C27.1
  other v1: 1789,1296
VPOS2: C26.1 C32.2 U1.F5 | length 144.9
  Top w6: C26.1 1694,1251.63 1686.73,1258.9 1686.73,1272.38 1693.71,1279.37 1703.42,1279.37 1716.26,1292.21 1716.26,1300.88 1718,1302.63 v1(1718,1315)
  Bottom w6: C32.2 1717,1314 v1(1718,1315)
pads on no net: FD1.1 FD2.1 FD3.1 FD4.1 FD5.1 FD6.1 FD7.1 FD8.1 H1.P$1 H1.P$2 IC1.6 IC1.9 J1.0 J1.MH1 J1.MH2 U1.A5 U1.A6 U1.A7 U1.B5 U1.B6 U1.C4 U1.C5 U1.C7 U1.D5 U1.D6 U1.E4 U1.E6 U1.E7 U2.6 U3.4
copper on no net:
  other v2: 1100.03,1325 2300.03,1325

## Polygon pours and split planes (outlines as drawn)
GND on 4-SIG "GND_L04_P012" (solid, remove dead copper, pour order 12): 965,1723 2537,1723 2537,939 952,939
VDD_1.2V_REG on 4-SIG "VDD_1.2V_REG_L04_P011" (solid, remove dead copper, pour order 11): 1890,1301 1890,1129 1702,1129 1702,1001 1975,1001 1975,1301
VDDIO_2.8V on 4-SIG "VDDIO_2.8V_L04_P000" (solid, remove dead copper, pour order 0): 1469,1504 1469,1053 1536,1053 1536,1328 1797,1328 1797,1504 1521,1504
VDDA_1.2V on 4-SIG "VDDA_1.2V_L04_P007" (solid, remove dead copper, pour order 7): 1633,1308 1633,1252 1562,1252 1562,1168 1708.13,1168 1708.13,1308.06
VDDAY on 4-SIG "VDDAY_L04_P006" (solid, remove dead copper, pour order 6): 1536,1328 1536,1254 1628.75,1254 1628.75,1328
VDDIO_2.8V on 4-SIG "VDDIO_2.8V_L04_P001" (solid, remove dead copper, pour order 1): 1708.56,1134 1708.56,1442 1883,1442 1883,1134
VCC_3.3V on 3-SIG "VCC_3.3V_L03_P005" (solid, remove dead copper, pour order 5): 965,1723 2537,1723 2537,939 952,939
VCC_2.8V on 3-SIG "VCC_2.8V_L03_P004" (solid, remove dead copper, pour order 4): 1439.85,1412.15 1439.85,1130.15 1516,1054 1879,1054 1918,1093 1918,1162 1492.5,1162 1492.5,1412.01
VDDAY on 3-SIG "VDDAY_L03_P003" (solid, remove dead copper, pour order 3): 1573,1334 1502,1334 1502,1168 1820,1168 1820,1245 1573,1245 1573,1269
VDD_2.8V on 3-SIG "VDD_2.8V_L03_P002" (solid, remove dead copper, pour order 2): 1755.42,1304.1 1690.9,1304.1 1643,1352 1556,1352 1556,1372 1709.68,1372 1760.5,1321.18 1760.5,1309.18
GND on 2-GND "GND_L02_P009" (solid, remove dead copper, pour order 9): 965,1723 2537,1723 2537,939 952,939
GND on 5-GND "GND_L05_P010" (solid, remove dead copper, pour order 10): 965,1723 2537,1723 2537,939 952,939

## Keep-outs
Keep-Out Layer:
  the board outline again, w5

## Other copper
Bottom:
  region net VDD_REG_SW: 1671,1138 1642,1138 1642,1109.41 1562,1109.41 1562,1054 1642,1054 1642,1092.44 1661.69,1092.44 1671,1101.76 1671,1109

## Silkscreen, mask and mechanical layers (free items; w line width, h text height)
Top Overlay:
  circle w10: c1100.03,1325 r90.14
  circle w10: c2300.03,1325 r90.14
Bottom Overlay:
  text "openmv.io" at 1409.4,1410.91 h27.2 r270
  text "PAG7936 R1" at 1983,1378 h27.2 r270
Dimension:
  lines w3.94: 2554,891.97 2659.98,891.97 2864.71,891.97 3015.9,891.97 ; 2554,942.73 2659.98,942.73 2864.71,942.73 3015.9,942.73 ; 2554,993.48 2659.98,993.48 2864.71,993.48 3015.9,993.48 ; 2554,1044.23 2659.98,1044.23 2864.71,1044.23 3015.9,1044.23 ; 2554,1094.98 2659.98,1094.98 2864.71,1094.98 3015.9,1094.98 ; 2554,1145.74 2659.98,1145.74 2864.71,1145.74 3015.9,1145.74 ; 2554,1196.49 2659.98,1196.49 2864.71,1196.49 3015.9,1196.49 ; 2554,1247.24 2659.98,1247.24 2864.71,1247.24 3015.9,1247.24 ; 2554,1297.99 2659.98,1297.99 2864.71,1297.99 3015.9,1297.99 ; 2554,1348.74 2659.98,1348.74 2864.71,1348.74 3015.9,1348.74 ; 2554,1399.5 2659.98,1399.5 2864.71,1399.5 3015.9,1399.5 ; 2554,1450.25 2659.98,1450.25 2864.71,1450.25 3015.9,1450.25 ; 2554,1501 2659.98,1501 2864.71,1501 3015.9,1501 ; 2554,1551.75 2659.98,1551.75 2864.71,1551.75 3015.9,1551.75 ; 2554,1602.5 3015.9,1602.5 ; 2659.98,1653.26 2659.98,841.22 ; 2864.71,1653.26 2864.71,841.22 ; 2659.98,841.22 2554,841.22 2554,1653.26 3015.9,1653.26 3015.9,841.22 2864.71,841.22 ; 2659.98,841.22 2864.71,841.22
  text "OpenMV PAG7936" at 1386,1677.7 h80
  text "Layer" at 2579.38,1615.19 h25.38
  text "Name" at 2685.35,1615.19 h25.38
  text "Thickness" at 2890.09,1615.19 h25.38
  text "Top Overlay" at 2685.35,1564.44 h25.38
  text "Top Solder" at 2685.35,1513.69 h25.38
  text "0.010mm" at 2890.09,1513.69 h25.38
  text "1" at 2579.38,1462.94 h25.38
  text "Top" at 2685.35,1462.94 h25.38
  text "0.035mm" at 2890.09,1462.94 h25.38
  text "Dielectric 2" at 2685.35,1412.18 h25.38
  text "0.127mm" at 2890.09,1412.18 h25.38
  text "2" at 2579.35,1361.43 h25.38
  text "2-GND" at 2685.33,1361.43 h25.38
  text "0.035mm" at 2890.09,1361.43 h25.38
  text "Dielectric 3" at 2685.35,1310.68 h25.38
  text "0.254mm" at 2890.09,1310.68 h25.38
  text "3" at 2579.38,1259.93 h25.38
  text "3-SIG" at 2685.35,1259.93 h25.38
  text "0.035mm" at 2890.09,1259.93 h25.38
  text "Dielectric 1" at 2685.35,1209.18 h25.38
  text "0.200mm" at 2890.09,1209.18 h25.38
  text "4" at 2579.38,1158.42 h25.38
  text "4-SIG" at 2685.35,1158.42 h25.38
  text "0.035mm" at 2890.09,1158.42 h25.38
  text "Dielectric 4" at 2685.35,1107.67 h25.38
  text "0.254mm" at 2890.09,1107.67 h25.38
  text "5" at 2579.38,1056.92 h25.38
  text "5-GND" at 2685.35,1056.92 h25.38
  text "0.035mm" at 2890.09,1056.92 h25.38
  text "TG-170 or equivalent substrate  / Er = 4.3-4.5 @ 1MHz / +/- 10% /  / double side solder mask red / double side silkscreen white /  / 3 mil min trace width and / 4 mil min isolation /  / RoHS required" at 3073,1027.11 h30
  text "Dielectric 5" at 2685.35,1006.17 h25.38
  text "0.127mm" at 2890.09,1006.17 h25.38
  text "6" at 2579.38,955.41 h25.38
  text "Bottom" at 2685.35,955.41 h25.38
  text "0.035mm" at 2890.09,955.41 h25.38
  text "Bottom Solder" at 2685.35,904.66 h25.38
  text "0.010mm" at 2890.09,904.66 h25.38
  text "Bottom Overlay" at 2685.35,853.91 h25.38

## Text inside footprints (layer, text, board x,y; h text height)
U1: Top 3D Body "chip center" at 1701.8,1350.07 h10; Top 3D Body "optical center" at 1715.56,1296.78 h10